# EAGLE board Neat Crift (1) (EAGLE 9.7.0)

Size 107.9 x 131.23 mm. Coordinates in mm from the lower left corner, seen from the top.
Outline: 0,0 107.9,0 107.9,131.24 0,131.24 0,0
Copper layers (1*16): Top 0.035mm / dielectric 1.5mm / Bottom 0.035mm
Design rules "default": minimum track width 6mil, minimum drill 0.35mm, track to track 6mil, track to pad 6mil, pad to pad 6mil, via to via 6mil, smd to smd 6mil, copper to edge 40mil, drill to drill 6mil, minimum pad ring 10mil, minimum via ring 8mil, stop-mask expansion 4mil, vias tented up to drill 0mil, thermal gap 10mil

## Footprints (pad centres in the part's own frame; a part is rotated, then mirrored left to right if it is on the bottom)
CAPPRD254W65D500H1150B = drill 0.85 pad 1.45: 1 -1.27,0; 2 1.27,0
LEDRD254W60D565H860B = drill 0.981 pad 1.581: 1 -1.27,0; 2 1.27,0
BATTERY-GENERIC = drill 1.118 pad 3.15 octagon: + 2.54,0; - -2.54,0
RESAD1016W63L850D250B = drill 0.83 pad 1.43: 1 -5.08,0; 2 5.08,0
DIP826W53P254L959H508Q8B = drill 0.786 pad 1.386: 1 -4.13,3.81; 2 -4.13,1.27; 3 -4.13,-1.27; 4 -4.13,-3.81; 5 4.13,-3.81; 6 4.13,-1.27; 7 4.13,1.27; 8 4.13,3.81

## Placement (x,y rotation side)
C1  47u  [CAPPRD254W65D500H1150B]  93.15,7.82 180 top
C2  47u  [CAPPRD254W65D500H1150B]  55.75,123.65 180 top
D1  RED  [LEDRD254W60D565H860B]  87.5,105.87 180 top
D2  RED  [LEDRD254W60D565H860B]  89.34,12.9 0 top
P1  BATTERYGENERIC  [BATTERY-GENERIC]  8.26,114.83 180 top
P2  BATTERYGENERIC  [BATTERY-GENERIC]  68.28,54.86 180 top
R1  220  [RESAD1016W63L850D250B]  83.69,103.33 0 top
R2  10k  [RESAD1016W63L850D250B]  93.15,30.68 0 top
R3  10k  [RESAD1016W63L850D250B]  82.99,28.14 0 top
R4  220  [RESAD1016W63L850D250B]  93.15,10.36 0 top
RR1  10k  [RESAD1016W63L850D250B]  98.93,121.11 0 top
RR2  10k  [RESAD1016W63L850D250B]  88.77,123.65 0 top
U1  LM555_DIP  [DIP826W53P254L959H508Q8B]  77.34,112.22 90 top
U2  LM555_DIP  [DIP826W53P254L959H508Q8B]  96.96,19.25 90 top

## Library data of the parts
C1 C2 P1 P2 R1-R4 RR1 RR2 = Tinkercad
D1 D2 = Tinkercad; CATEGORY: Opto-Electronic; SUB-CATEGORY: LED; VALUE: LED_RED
U1 U2 = Tinkercad; CATEGORY: IC_Clock-Timing; CURRENT-SUPPLY: 10mA; DESCRIPTION: IC OSC SINGLE TIMER 100KHZ 8-DIP; FREQUENCY: 100kHz; MANUFACTURER: Texas Instruments; MPN: LM555CN/NOPB; OPERATING_TEMP: 0°C to 70°C; PART_STATUS: Active; ROHS_COMPLIANT: ROHS3 Compliant; SUB-CATEGORY: Timer

## Nets
D1_A: D1.1 R1.2
D2_A: D2.1 R4.1
P1+: P1.+ RR1.2 U1.4 U1.8
P1-: C2.2 D1.2 P1.- U1.1
P2+: P2.+ R3.1 U2.4 U2.8
P2-: C1.2 D2.2 P2.- U2.1
U1_DIS: RR1.1 RR2.2 U1.7
U1_OUT: R1.1 U1.3
U1_THR: C2.1 RR2.1 U1.2 U1.6
U2_DIS: R2.1 R3.2 U2.7
U2_OUT: R4.2 U2.3
U2_THR: C1.1 R2.2 U2.2 U2.6

## Tracks (layer width: path | path; a pad name or v marks a point on that pad's centre or on a via)
D1_A  (1 unrouted)
D2_A  (1 unrouted)
P1+  (3 unrouted)
P1-  (3 unrouted)
P2+  (3 unrouted)
P2-  (3 unrouted)
U1_DIS  (2 unrouted)
U1_OUT  (1 unrouted)
U1_THR  (3 unrouted)
U2_DIS  (2 unrouted)
U2_OUT  (1 unrouted)
U2_THR  (3 unrouted)